# Altium PCB PCB1.PcbDoc
Units mm, origin at the board's own origin, x right, y up, seen from the top; angles counter-clockwise.
Board outline 85 x 35 mm, 2 copper layers (Top Layer, Bottom Layer); 10 components, 13 nets, 37 pads, 4 vias.
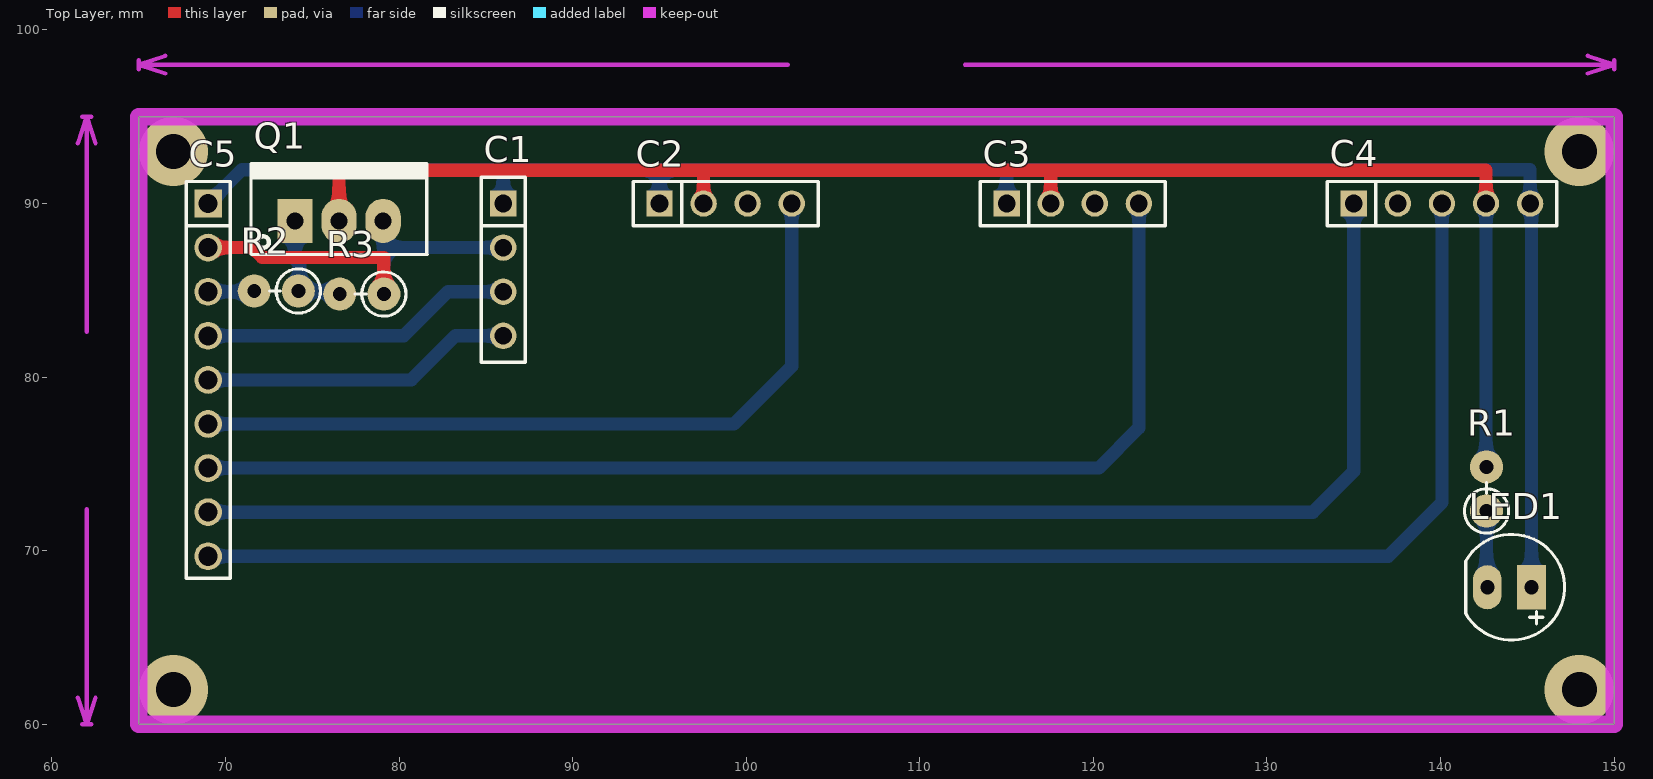
[diagram p0: Top Layer view]
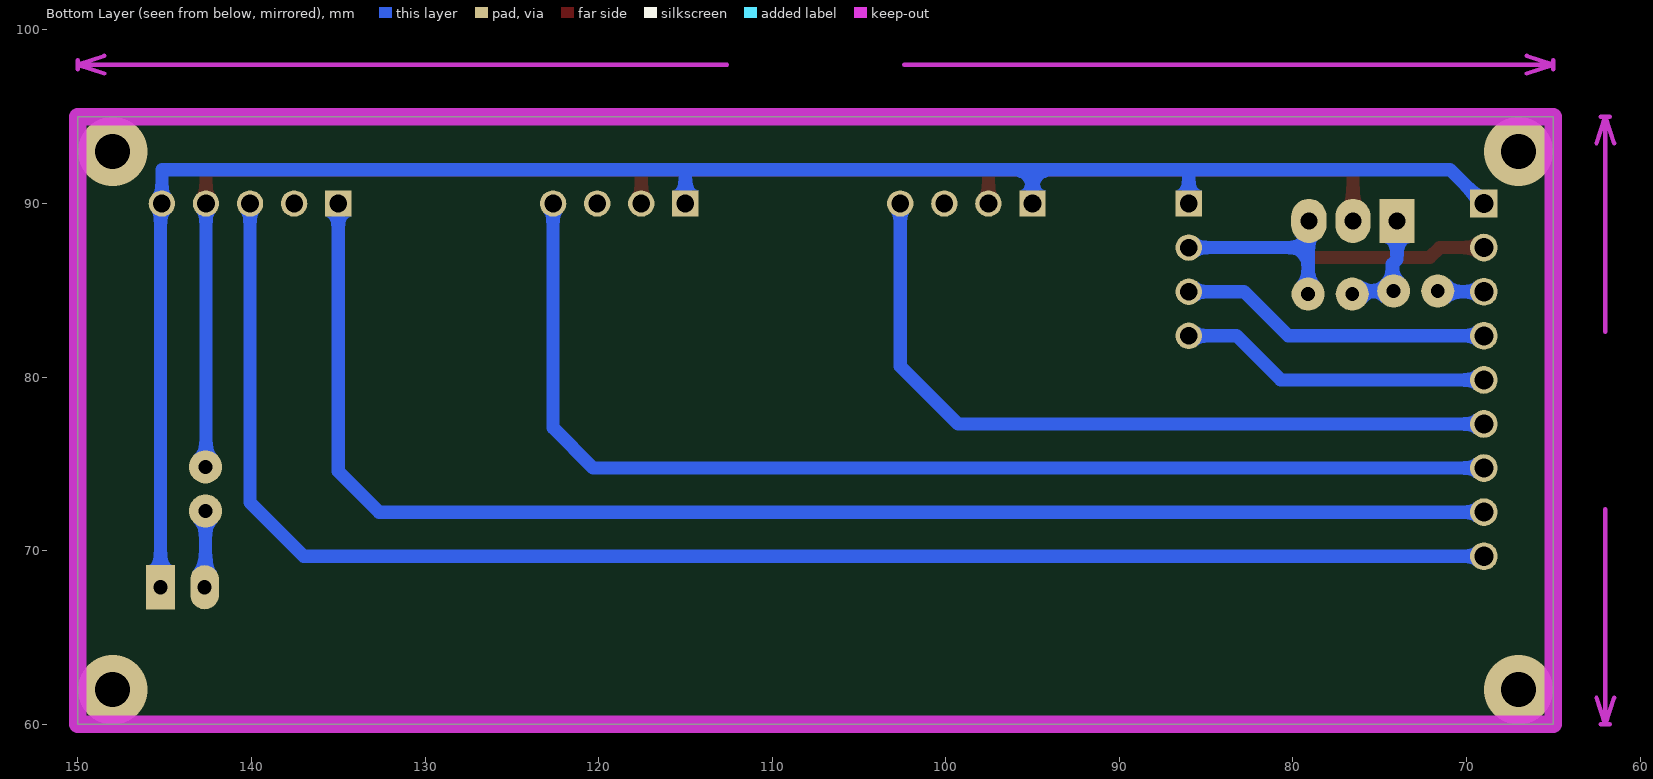
[diagram p1: Bottom Layer view, seen from below]
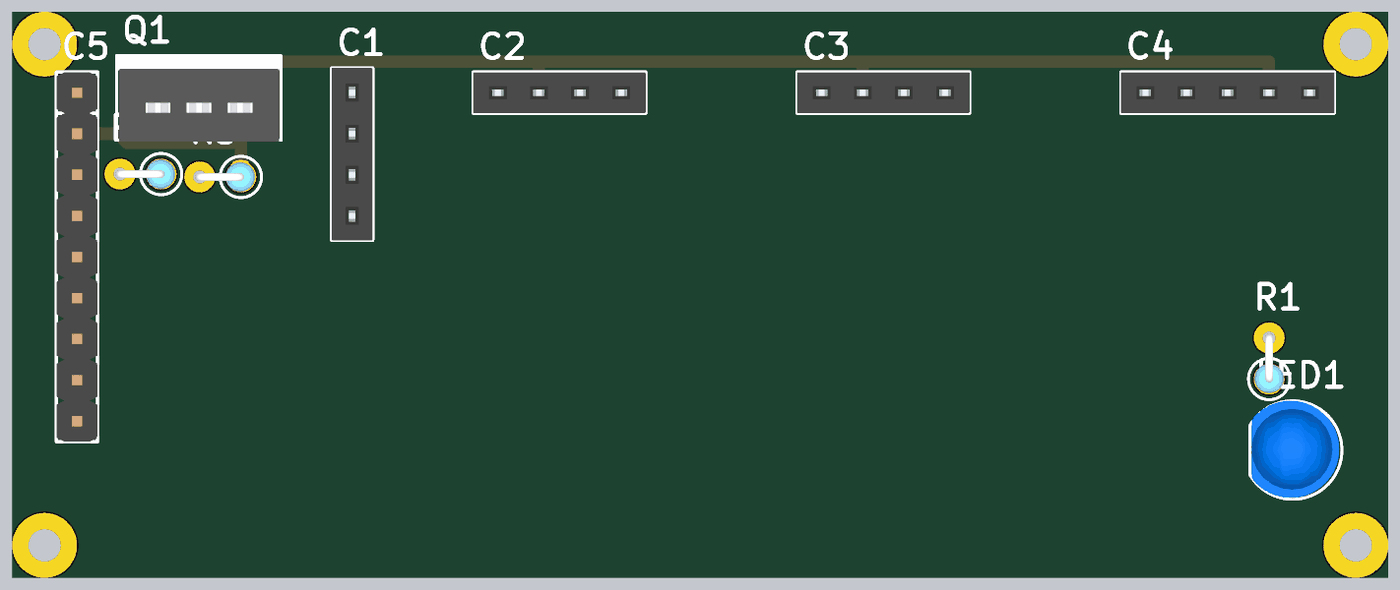
[diagram p2: 3D render of the assembled board from above, using the file's embedded part models]

## Layer stack, top to bottom
Top Solder: solder mask 0.0102, Solder Resist, Dk 3.5
Top Layer: signal copper 0.0356
Dielectric 1: dielectric 0.32, FR-4, Dk 4.8
Bottom Layer: signal copper 0.0356
Bottom Solder: solder mask 0.0102, Solder Resist, Dk 3.5

## Board outline
65,60 65,95 150,95 150,60

## Design rules (kind name [scope] priority, off if disabled: settings)
Clearance [All] p1: gap=0.254
PolygonConnect [All] p1: connectstyle=Relief reliefconductorwidth=0.254 reliefentries=4 polygonreliefangle="90 Angle" airgapwidth=0.254
RoutingVias [All] p1: holewidth=0.711 width=1.27 viastyle="Through Hole" minholewidth=0.711 minwidth=1.27 maxholewidth=0.711 maxwidth=1.27
SolderMaskExpansion [All] p1: expansion=0.102
Width [All] p1: maxlimit=0.762 minlimit=0.762 preferedwidth=0.762
30 further rules are at their usual default settings.

## Classes and differential pairs
component class Sheet3: C1 C2 C3 C4 C5 LED1 Q1 R2 R3

## Components (designator, comment, footprint, x,y, rotation, side; value= is the part's Value field where it differs from the comment)
C1 "JP4" JP4-C1T 86,90 r270 top
C2 "JP4" JP4-C1T 95,90 r0 top
C3 "JP4" JP4-C1T 115,90 r0 top
C4 "JP5" JP5-C1T 135,90 r0 top
C5 "JP9" JP9-D1T 69,90 r270 top
LED1 "LED" LED-5-BLUE 144.094,67.894 r180 top
Q1 "TIP41C" TO220-123 74,89 r0 top
R1 "Res" RES-1/8WD 142.646,73.558 r90 top
R2 "Res" RES-1/8WD 72.923,84.963 r180 top
R3 "Res" RES-1/8WD 77.851,84.785 r180 top

## Footprints (in the part's own frame and the unit in brackets; to place one, negate y for a bottom-side part, rotate by r counter-clockwise, add the part's x,y. Pads: shape width x height; smd on the part's side, far side on the other; paste and mask are expansions set on the pad)
JP4-C1T [mm] "4 row, straight, gold plating"
  rect 1.52x1.52 hole 1.02: 1(0,0)
  round 1.52 hole 1.02: 2(2.54,0) 3(5.08,0) 4(7.62,0)
  silkscreen extent -1.52,-1.27 9.14,1.27, body extent -1.52,-1.25 9.14,1.25, height 8.51
JP5-C1T [mm] "5 row, straight, gold plating"
  rect 1.52x1.52 hole 1.02: 1(0,0)
  round 1.52 hole 1.02: 2(2.54,0) 3(5.08,0) 4(7.62,0) 5(10.16,0)
  silkscreen extent -1.52,-1.27 11.68,1.27, body extent -1.52,-1.25 11.68,1.25, height 8.51
JP9-D1T [mm] "9 pins, 1 row, straight, gold plating"
  rect 1.6x1.6 hole 1.1: 1(0,0)
  round 1.6 hole 1.1: 2(2.54,0) 3(5.08,0) 4(7.62,0) 5(10.16,0) 6(12.7,0) 7(15.24,0) 8(17.78,0) 9(20.32,0)
  silkscreen extent -1.27,-1.27 21.59,1.27, body extent -1.27,-1.27 21.59,1.27, height 8.54
LED-5-BLUE [mil] "LED 2 PIN, 5 ly , Only colour, pin to pin 110mil"
  rect 65x100 hole 32: 1(-45,0)
  oval 65x100 hole 32: 2(55,0)
  silkscreen extent -120,-120 104,120, body extent -113,-120 100,117, height 339
RES-1/8WD [mm]
  round 1.905 hole 0.8: 1(-1.27,0) 2(1.27,0)
  silkscreen extent -2.55,-1.28 0.38,1.27, body extent -2.16,-0.92 1.55,0.92, height 7.3
TO220-123 [mil] "TO-220 - 1-2-3"
  rect 80x100 hole 39: 1(0,0)
  oval 80x100 hole 39: 2(100,0) 3(200,0)
  silkscreen extent -100,-76 300,130, body extent -95,-80 295,97, height 323

## Part data
C1 C2 C3 C4 C5: "WR-PHD 2.54 mm Angled Socket Header"
LED1: "LED Single colour Green and Red"
Q1: "NPN 2W, BCE"

## Via types
v1: diameter 4, hole 2, Top Layer to Bottom Layer, 4 vias

## Nets (pads, with @x,y where several pads share a name; then routed paths per layer and width w, separated by ;. In a path a pad name is that pad's centre, name@x,y a point inside that pad or via, vN(x,y) a via of type N, cw(c..) or ccw(c..) an arc to the next point about the centre after c; other vN are vias at no path point)
CO: C4.1 C5.8 | length 82.4
  Bottom Layer w0.762: C5.8 132.647,72.22 135,74.573 C4.1
D0: C5.3 R2.2 | length 2.8
  Bottom Layer w0.762: C5.3 71.65,84.92 R2.2@71.73,85
GND: C1.2 C5.2 Q1.3 R3.1 | length 26.2
  Top Layer w0.762: C5.2 71.544,87.46 72.111,86.893 79.121,86.893 R3.1
  Bottom Layer w0.762: Q1.3 79.121,88.959 R3.1 79.121,87.46 C1.2
NetC2_2: C2.2 C3.2 C4.4 Q1.2 R1.2 | length 90
  Top Layer w0.762: Q1.2 76.54,91.923 97.536,91.923 ; C2.2 97.54,91.919 97.536,91.923 ; C3.2 117.54,91.781 117.399,91.923 ; C4.4 142.62,91.923 117.399,91.923 ; 97.536,91.923 117.399,91.923
  Bottom Layer w0.762: C4.4 142.62,74.855 R1.2
NetLED1_2: LED1.2 R1.1 | length 4.3
  Bottom Layer w0.762: LED1.2@142.646,67.945 R1.1
NetQ1_1: Q1.1 R2.1 R3.2 | length 6.3
  Bottom Layer w0.762: Q1.1 74,86.782 74.27,86.512 R2.1@74.27,85 ; R2.1 R3.2@76.403,84.963
NH3: C4.2
NO2: C4.3 C5.9 | length 89.6
  Bottom Layer w0.762: C5.9 136.99,69.68 140.08,72.77 C4.3
O3: C3.4 C5.7 | length 67.5
  Bottom Layer w0.762: C5.7 120.302,74.76 122.62,77.078 C3.4
RX: C1.3 C5.4 | length 18.1
  Bottom Layer w0.762: C5.4 80.272,82.38 82.812,84.92 C1.3
SO2: C2.4 C5.6 | length 44.4
  Bottom Layer w0.762: C5.6 99.296,77.3 102.62,80.624 C2.4
TX: C1.4 C5.5 | length 18.1
  Bottom Layer w0.762: C5.5 80.704,79.84 83.244,82.38 C1.4
VCC: C1.1 C2.1 C3.1 C4.5 C5.1 LED1.1 | length 106.9
  Bottom Layer w0.762: C5.1 70.948,91.948 115.011,91.948 ; C1.1 86,91.918 ; C2.1 95,91.948 ; C3.1 115,91.937 115.011,91.948 ; LED1.1 145.237,89.923 C4.5 145.16,91.948 115.011,91.948
pads on no net: C2.3 C3.3
copper on no net:
  other v1: 67,62 148,62 67,93 148,93

## Keep-outs
Keep-Out Layer:
  lines w0.254: 61.492,61.524 62,60 ; 61.492,93.476 62,95 ; 61.746,60 62.254,60 ; 61.746,95 62.254,95 ; 62,72.396 62,60 ; 62,82.604 62,95 ; 62.508,61.524 62,60 ; 62.508,93.476 62,95 ; 65,97.746 65,98.254 ; 66.524,97.492 65,98 ; 66.524,98.508 65,98 ; 102.396,98 65,98 ; 112.604,98 150,98 ; 148.476,97.492 150,98 ; 148.476,98.508 150,98 ; 150,97.746 150,98.254
  lines w1: 65,60 65,95 150,95 150,60 65,60
  text "85 (mm)" at 102.65,97.086 h1.52
  text "35 (mm)" at 62.914,72.65 h1.52 r90